# Altium PCB acqboard.PcbDoc (part 4 of 5)
Units mil, origin at the board's own origin, x right, y up, seen from the top; angles counter-clockwise.
Board outline 7000 x 5250 mil, 4 copper layers (Top Layer, Internal Plane 1, Internal Plane 2, Bottom Layer); 570 components, 356 nets, 1973 pads, 766 vias.
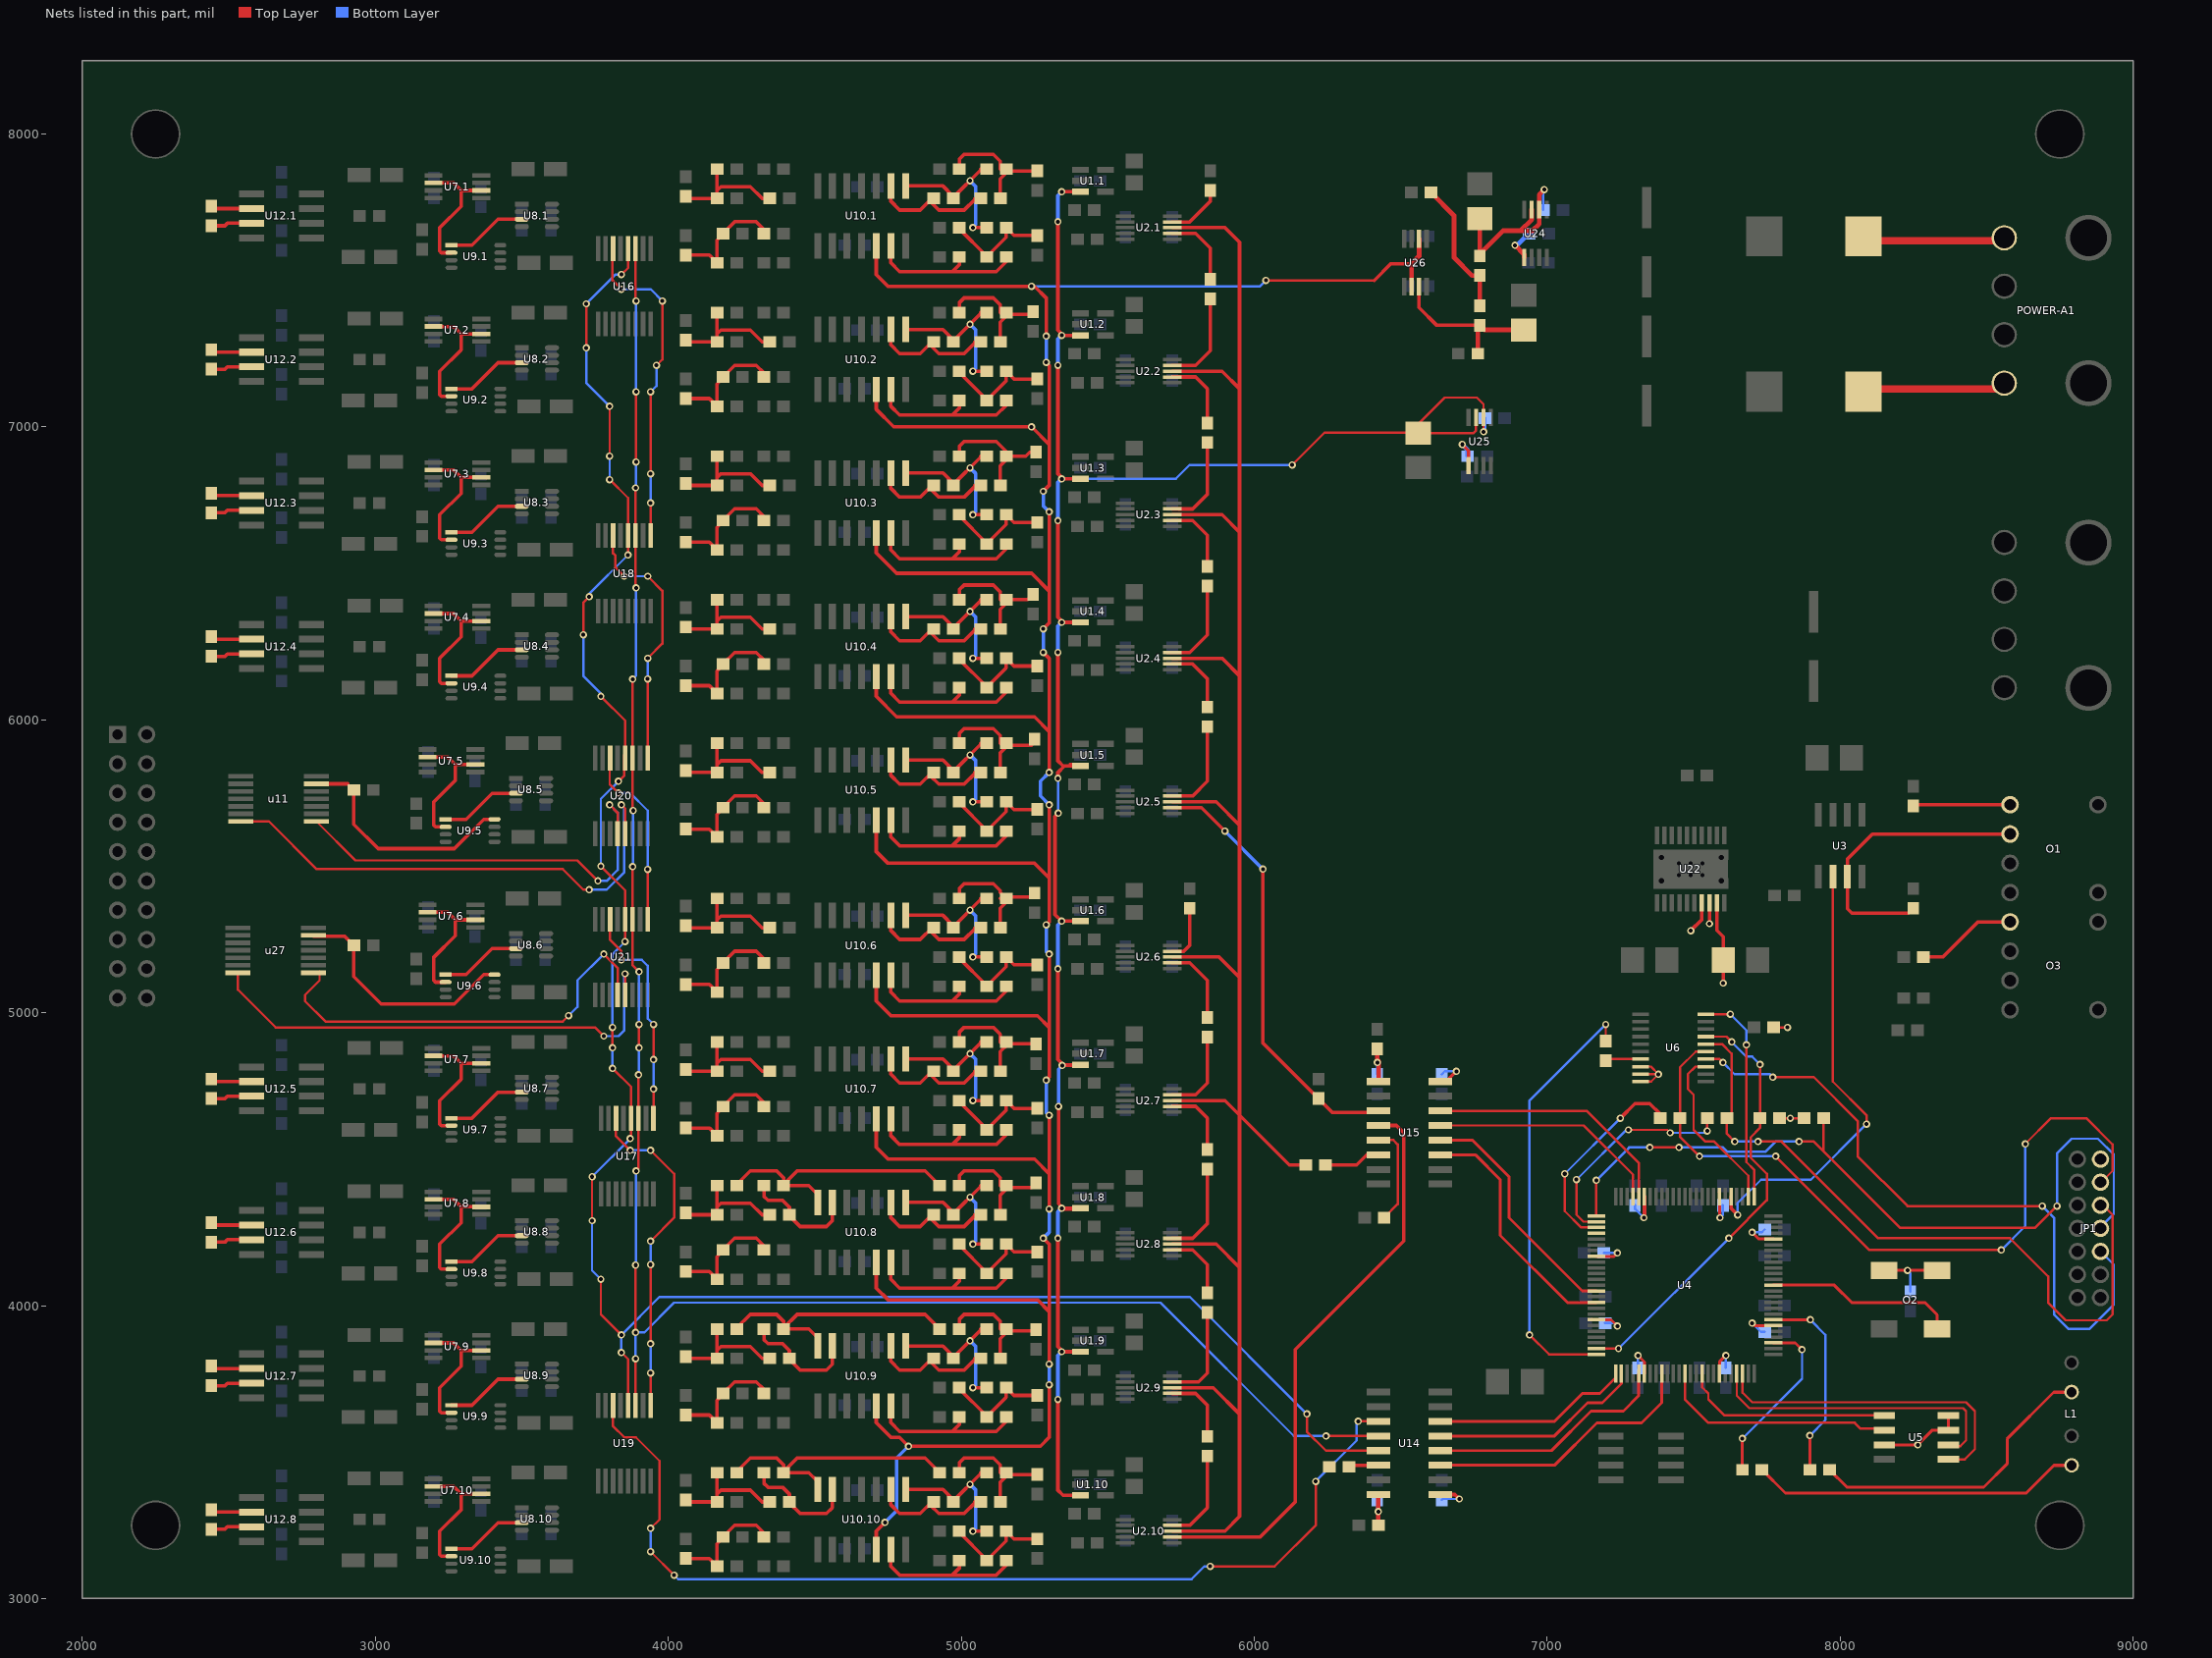
[diagram p6: the nets of this part, all layers, seen from the top]

## Via types
v1: diameter 25, hole 13.5, Top Layer to Bottom Layer, 753 vias
v2: diameter 40, hole 20, Top Layer to Bottom Layer, 13 vias

## Nets (pads, with @x,y where several pads share a name; then routed paths per layer and width w, separated by ;. In a path a pad name is that pad's centre, name@x,y a point inside that pad or via, vN(x,y) a via of type N, cw(c..) or ccw(c..) an arc to the next point about the centre after c; other vN are vias at no path point) (continued)
NetC36.8_1: C36.8.1 R15.8.1 R22.8.1 U10.8.14 | length 934.5
  Top Layer w12: R15.8.1@4233.46,4410 4233.46,4413.46 4280,4460 4370,4460 4393.46,4436.54 C36.8.1@4393.46,4410 4480,4410 4510,4380 U10.8.14@4510,4352.36 ; C36.8.1@4393.46,4413.46 4440,4460 4876.54,4460 R22.8.1@4916.54,4420
NetC36.8_2: C36.8.2 R19.8.2 U10.8.13 | length 401.1
  Top Layer w12: C36.8.2@4326.54,4410 4326.54,4373.46 4340,4360 4390,4360 4413.46,4336.54 4413.46,4306.54 4450,4270 4540,4270 4560,4290 U10.8.13@4560,4352.36
NetC36.9_1: C36.9.1 R15.9.1 R22.9.1 U10.9.14 | length 934.5
  Top Layer w12: R15.9.1@4233.46,3920 4233.46,3923.46 4280,3970 4370,3970 4393.46,3946.54 C36.9.1@4393.46,3920 4480,3920 4510,3890 U10.9.14@4510,3862.36 ; C36.9.1@4393.46,3923.46 4440,3970 4876.54,3970 R22.9.1@4916.54,3930
NetC36.9_2: C36.9.2 R19.9.2 U10.9.13 | length 401.1
  Top Layer w12: C36.9.2@4326.54,3920 4326.54,3883.46 4340,3870 4390,3870 4413.46,3846.54 4413.46,3816.54 4450,3780 4540,3780 4560,3800 U10.9.13@4560,3862.36
NetC36.10_1: C36.10.1 R15.10.1 R22.10.1 U10.10.14 | length 934.5
  Top Layer w12: R15.10.1@4233.46,3430 4233.46,3433.46 4280,3480 4370,3480 4393.46,3456.54 C36.10.1@4393.46,3430 4480,3430 4510,3400 U10.10.14@4510,3372.36 ; C36.10.1@4393.46,3433.46 4440,3480 4876.54,3480 R22.10.1@4916.54,3440
NetC36.10_2: C36.10.2 R19.10.2 U10.10.13 | length 401.1
  Top Layer w12: C36.10.2@4326.54,3430 4326.54,3393.46 4340,3380 4390,3380 4413.46,3356.54 4413.46,3326.54 4450,3290 4540,3290 4560,3310 U10.10.13@4560,3372.36
NetC37.1_2: C37.1.2 R14.1.2 R16.1.2 R17.1.1 | length 388.3
  Top Layer w12: 4080,7586.54 4140,7586.54 C37.1.2@4166.54,7560 4166.54,7636.54 R17.1.1@4190,7660 ; R17.1.1@4186.54,7660 4226.54,7700 4300,7700 4326.54,7673.46 R14.1.2@4326.54,7660
NetC37.2_2: C37.2.2 R14.2.2 R16.2.2 R17.2.1 | length 388.3
  Top Layer w12: 4080,7096.54 4140,7096.54 C37.2.2@4166.54,7070 4166.54,7146.54 R17.2.1@4190,7170 ; R17.2.1@4186.54,7170 4226.54,7210 4300,7210 4326.54,7183.46 R14.2.2@4326.54,7170
NetC37.3_2: C37.3.2 R14.3.2 R16.3.2 R17.3.1 | length 388.3
  Top Layer w12: 4080,6606.54 4140,6606.54 C37.3.2@4166.54,6580 4166.54,6656.54 R17.3.1@4190,6680 ; R17.3.1@4186.54,6680 4226.54,6720 4300,6720 4326.54,6693.46 R14.3.2@4326.54,6680
NetC37.4_2: C37.4.2 R14.4.2 R16.4.2 R17.4.1 | length 388.3
  Top Layer w12: 4080,6116.54 4140,6116.54 C37.4.2@4166.54,6090 4166.54,6166.54 R17.4.1@4190,6190 ; R17.4.1@4186.54,6190 4226.54,6230 4300,6230 4326.54,6203.46 R14.4.2@4326.54,6190
NetC37.5_2: C37.5.2 R14.5.2 R16.5.2 R17.5.1 | length 388.3
  Top Layer w12: 4080,5626.54 4140,5626.54 C37.5.2@4166.54,5600 4166.54,5676.54 R17.5.1@4190,5700 ; R17.5.1@4186.54,5700 4226.54,5740 4300,5740 4326.54,5713.46 R14.5.2@4326.54,5700
NetC37.6_2: C37.6.2 R14.6.2 R16.6.2 R17.6.1 | length 388.3
  Top Layer w12: 4080,5096.54 4140,5096.54 C37.6.2@4166.54,5070 4166.54,5146.54 R17.6.1@4190,5170 ; R17.6.1@4186.54,5170 4226.54,5210 4300,5210 4326.54,5183.46 R14.6.2@4326.54,5170
NetC37.7_2: C37.7.2 R14.7.2 R16.7.2 R17.7.1 | length 388.3
  Top Layer w12: 4080,4606.54 4140,4606.54 C37.7.2@4166.54,4580 4166.54,4656.54 R17.7.1@4190,4680 ; R17.7.1@4186.54,4680 4226.54,4720 4300,4720 4326.54,4693.46 R14.7.2@4326.54,4680
NetC37.8_2: C37.8.2 R14.8.2 R16.8.2 R17.8.1 | length 388.3
  Top Layer w12: 4080,4116.54 4140,4116.54 C37.8.2@4166.54,4090 4166.54,4166.54 R17.8.1@4190,4190 ; R17.8.1@4186.54,4190 4226.54,4230 4300,4230 4326.54,4203.46 R14.8.2@4326.54,4190
NetC37.9_2: C37.9.2 R14.9.2 R16.9.2 R17.9.1 | length 388.3
  Top Layer w12: 4080,3626.54 4140,3626.54 C37.9.2@4166.54,3600 4166.54,3676.54 R17.9.1@4190,3700 ; R17.9.1@4186.54,3700 4226.54,3740 4300,3740 4326.54,3713.46 R14.9.2@4326.54,3700
NetC37.10_2: C37.10.2 R14.10.2 R16.10.2 R17.10.1 | length 388.3
  Top Layer w12: 4080,3136.54 4140,3136.54 C37.10.2@4166.54,3110 4166.54,3186.54 R17.10.1@4190,3210 ; R17.10.1@4186.54,3210 4226.54,3250 4300,3250 4326.54,3223.46 R14.10.2@4326.54,3210
NetC38.1_2: C38.1.2 R15.1.2 R18.1.2 R19.1.1 | length 411.4
  Top Layer w12: C38.1.2@4060,7786.54 4066.54,7780 R18.1.2@4166.54,7780 R15.1.2@4166.54,7880 ; 4166.54,7806.54 4180,7820 4280,7820 4320,7780 R19.1.1@4346.54,7780
NetC38.2_2: C38.2.2 R15.2.2 R18.2.2 R19.2.1 | length 411.4
  Top Layer w12: C38.2.2@4060,7296.54 4066.54,7290 R18.2.2@4166.54,7290 R15.2.2@4166.54,7390 ; 4166.54,7316.54 4180,7330 4280,7330 4320,7290 R19.2.1@4346.54,7290
NetC38.3_2: C38.3.2 R15.3.2 R18.3.2 R19.3.1 | length 411.4
  Top Layer w12: C38.3.2@4060,6806.54 4066.54,6800 R18.3.2@4166.54,6800 R15.3.2@4166.54,6900 ; 4166.54,6826.54 4180,6840 4280,6840 4320,6800 R19.3.1@4346.54,6800
NetC38.4_2: C38.4.2 R15.4.2 R18.4.2 R19.4.1 | length 411.4
  Top Layer w12: C38.4.2@4060,6316.54 4066.54,6310 R18.4.2@4166.54,6310 R15.4.2@4166.54,6410 ; 4166.54,6336.54 4180,6350 4280,6350 4320,6310 R19.4.1@4346.54,6310
NetC38.5_2: C38.5.2 R15.5.2 R18.5.2 R19.5.1 | length 411.4
  Top Layer w12: C38.5.2@4060,5826.54 4066.54,5820 R18.5.2@4166.54,5820 R15.5.2@4166.54,5920 ; 4166.54,5846.54 4180,5860 4280,5860 4320,5820 R19.5.1@4346.54,5820
NetC38.6_2: C38.6.2 R15.6.2 R18.6.2 R19.6.1 | length 411.4
  Top Layer w12: C38.6.2@4060,5296.54 4066.54,5290 R18.6.2@4166.54,5290 R15.6.2@4166.54,5390 ; 4166.54,5316.54 4180,5330 4280,5330 4320,5290 R19.6.1@4346.54,5290
NetC38.7_2: C38.7.2 R15.7.2 R18.7.2 R19.7.1 | length 411.4
  Top Layer w12: C38.7.2@4060,4806.54 4066.54,4800 R18.7.2@4166.54,4800 R15.7.2@4166.54,4900 ; 4166.54,4826.54 4180,4840 4280,4840 4320,4800 R19.7.1@4346.54,4800
NetC38.8_2: C38.8.2 R15.8.2 R18.8.2 R19.8.1 | length 411.4
  Top Layer w12: C38.8.2@4060,4316.54 4066.54,4310 R18.8.2@4166.54,4310 R15.8.2@4166.54,4410 ; 4166.54,4336.54 4180,4350 4280,4350 4320,4310 R19.8.1@4346.54,4310
NetC38.9_2: C38.9.2 R15.9.2 R18.9.2 R19.9.1 | length 411.4
  Top Layer w12: C38.9.2@4060,3826.54 4066.54,3820 R18.9.2@4166.54,3820 R15.9.2@4166.54,3920 ; 4166.54,3846.54 4180,3860 4280,3860 4320,3820 R19.9.1@4346.54,3820
NetC38.10_2: C38.10.2 R15.10.2 R18.10.2 R19.10.1 | length 411.4
  Top Layer w12: C38.10.2@4060,3336.54 4066.54,3330 R18.10.2@4166.54,3330 R15.10.2@4166.54,3430 ; 4166.54,3356.54 4180,3370 4280,3370 4320,3330 R19.10.1@4346.54,3330
NetC39.1_1: C39.1.1 R20.1.1 R24.1.1 U10.1.8 | length 535.8
  Top Layer w12: U10.1.8@4810,7822.36 4937.64,7822.36 C39.1.1@4970,7790 ; C39.1.1@4970,7780 5066.54,7876.54 R20.1.1@5066.54,7880 ; v1(5040,7680) R24.1.1@5086.54,7680 R24.1.1@5086.54,7683.46
  Bottom Layer w12: v1(5030,7840) 5050,7820 5050,7690 v1(5040,7680)
NetC39.1_2: C39.1.2 R23.1.2 U10.1.9 | length 411.7
  Top Layer w12: U10.1.9@4760,7822.36 4760,7770 4790,7740 4860,7740 4900,7780 C39.1.2@4906.54,7780 ; C39.1.2@4893.7,7770 4923.7,7740 5010,7740 5046.54,7776.54 R23.1.2@5046.54,7780
NetC39.2_1: C39.2.1 R20.2.1 R24.2.1 U10.2.8 | length 535.8
  Top Layer w12: U10.2.8@4810,7332.36 4937.64,7332.36 C39.2.1@4970,7300 ; C39.2.1@4970,7290 5066.54,7386.54 R20.2.1@5066.54,7390 ; v1(5040,7190) R24.2.1@5086.54,7190 R24.2.1@5086.54,7193.46
  Bottom Layer w12: v1(5030,7350) 5050,7330 5050,7200 v1(5040,7190)
NetC39.2_2: C39.2.2 R23.2.2 U10.2.9 | length 411.7
  Top Layer w12: U10.2.9@4760,7332.36 4760,7280 4790,7250 4860,7250 4900,7290 C39.2.2@4906.54,7290 ; C39.2.2@4893.7,7280 4923.7,7250 5010,7250 5046.54,7286.54 R23.2.2@5046.54,7290
NetC39.3_1: C39.3.1 R20.3.1 R24.3.1 U10.3.8 | length 535.8
  Top Layer w12: U10.3.8@4810,6842.36 4937.64,6842.36 C39.3.1@4970,6810 ; C39.3.1@4970,6800 5066.54,6896.54 R20.3.1@5066.54,6900 ; v1(5040,6700) R24.3.1@5086.54,6700 R24.3.1@5086.54,6703.46
  Bottom Layer w12: v1(5030,6860) 5050,6840 5050,6710 v1(5040,6700)
NetC39.3_2: C39.3.2 R23.3.2 U10.3.9 | length 411.7
  Top Layer w12: U10.3.9@4760,6842.36 4760,6790 4790,6760 4860,6760 4900,6800 C39.3.2@4906.54,6800 ; C39.3.2@4893.7,6790 4923.7,6760 5010,6760 5046.54,6796.54 R23.3.2@5046.54,6800
NetC39.4_1: C39.4.1 R20.4.1 R24.4.1 U10.4.8 | length 535.8
  Top Layer w12: U10.4.8@4810,6352.36 4937.64,6352.36 C39.4.1@4970,6320 ; C39.4.1@4970,6310 5066.54,6406.54 R20.4.1@5066.54,6410 ; v1(5040,6210) R24.4.1@5086.54,6210 R24.4.1@5086.54,6213.46
  Bottom Layer w12: v1(5030,6370) 5050,6350 5050,6220 v1(5040,6210)
NetC39.4_2: C39.4.2 R23.4.2 U10.4.9 | length 411.7
  Top Layer w12: U10.4.9@4760,6352.36 4760,6300 4790,6270 4860,6270 4900,6310 C39.4.2@4906.54,6310 ; C39.4.2@4893.7,6300 4923.7,6270 5010,6270 5046.54,6306.54 R23.4.2@5046.54,6310
NetC39.5_1: C39.5.1 R20.5.1 R24.5.1 U10.5.8 | length 535.8
  Top Layer w12: U10.5.8@4810,5862.36 4937.64,5862.36 C39.5.1@4970,5830 ; C39.5.1@4970,5820 5066.54,5916.54 R20.5.1@5066.54,5920 ; v1(5040,5720) R24.5.1@5086.54,5720 R24.5.1@5086.54,5723.46
  Bottom Layer w12: v1(5030,5880) 5050,5860 5050,5730 v1(5040,5720)
NetC39.5_2: C39.5.2 R23.5.2 U10.5.9 | length 411.7
  Top Layer w12: U10.5.9@4760,5862.36 4760,5810 4790,5780 4860,5780 4900,5820 C39.5.2@4906.54,5820 ; C39.5.2@4893.7,5810 4923.7,5780 5010,5780 5046.54,5816.54 R23.5.2@5046.54,5820
NetC39.6_1: C39.6.1 R20.6.1 R24.6.1 U10.6.8 | length 535.8
  Top Layer w12: U10.6.8@4810,5332.36 4937.64,5332.36 C39.6.1@4970,5300 ; C39.6.1@4970,5290 5066.54,5386.54 R20.6.1@5066.54,5390 ; v1(5040,5190) R24.6.1@5086.54,5190 R24.6.1@5086.54,5193.46
  Bottom Layer w12: v1(5030,5350) 5050,5330 5050,5200 v1(5040,5190)
NetC39.6_2: C39.6.2 R23.6.2 U10.6.9 | length 411.7
  Top Layer w12: U10.6.9@4760,5332.36 4760,5280 4790,5250 4860,5250 4900,5290 C39.6.2@4906.54,5290 ; C39.6.2@4893.7,5280 4923.7,5250 5010,5250 5046.54,5286.54 R23.6.2@5046.54,5290
NetC39.7_1: C39.7.1 R20.7.1 R24.7.1 U10.7.8 | length 535.8
  Top Layer w12: U10.7.8@4810,4842.36 4937.64,4842.36 C39.7.1@4970,4810 ; C39.7.1@4970,4800 5066.54,4896.54 R20.7.1@5066.54,4900 ; v1(5040,4700) R24.7.1@5086.54,4700 R24.7.1@5086.54,4703.46
  Bottom Layer w12: v1(5030,4860) 5050,4840 5050,4710 v1(5040,4700)
NetC39.7_2: C39.7.2 R23.7.2 U10.7.9 | length 411.7
  Top Layer w12: U10.7.9@4760,4842.36 4760,4790 4790,4760 4860,4760 4900,4800 C39.7.2@4906.54,4800 ; C39.7.2@4893.7,4790 4923.7,4760 5010,4760 5046.54,4796.54 R23.7.2@5046.54,4800
NetC39.8_1: C39.8.1 R20.8.1 R24.8.1 U10.8.8 | length 535.8
  Top Layer w12: U10.8.8@4810,4352.36 4937.64,4352.36 C39.8.1@4970,4320 ; C39.8.1@4970,4310 5066.54,4406.54 R20.8.1@5066.54,4410 ; v1(5040,4210) R24.8.1@5086.54,4210 R24.8.1@5086.54,4213.46
  Bottom Layer w12: v1(5030,4370) 5050,4350 5050,4220 v1(5040,4210)
NetC39.8_2: C39.8.2 R23.8.2 U10.8.9 | length 411.7
  Top Layer w12: U10.8.9@4760,4352.36 4760,4300 4790,4270 4860,4270 4900,4310 C39.8.2@4906.54,4310 ; C39.8.2@4893.7,4300 4923.7,4270 5010,4270 5046.54,4306.54 R23.8.2@5046.54,4310
NetC39.9_1: C39.9.1 R20.9.1 R24.9.1 U10.9.8 | length 535.8
  Top Layer w12: U10.9.8@4810,3862.36 4937.64,3862.36 C39.9.1@4970,3830 ; C39.9.1@4970,3820 5066.54,3916.54 R20.9.1@5066.54,3920 ; v1(5040,3720) R24.9.1@5086.54,3720 R24.9.1@5086.54,3723.46
  Bottom Layer w12: v1(5030,3880) 5050,3860 5050,3730 v1(5040,3720)
NetC39.9_2: C39.9.2 R23.9.2 U10.9.9 | length 411.7
  Top Layer w12: U10.9.9@4760,3862.36 4760,3810 4790,3780 4860,3780 4900,3820 C39.9.2@4906.54,3820 ; C39.9.2@4893.7,3810 4923.7,3780 5010,3780 5046.54,3816.54 R23.9.2@5046.54,3820
NetC39.10_1: C39.10.1 R20.10.1 R24.10.1 U10.10.8 | length 535.8
  Top Layer w12: U10.10.8@4810,3372.36 4937.64,3372.36 C39.10.1@4970,3340 ; C39.10.1@4970,3330 5066.54,3426.54 R20.10.1@5066.54,3430 ; v1(5040,3230) R24.10.1@5086.54,3230 R24.10.1@5086.54,3233.46
  Bottom Layer w12: v1(5030,3390) 5050,3370 5050,3240 v1(5040,3230)
NetC39.10_2: C39.10.2 R23.10.2 U10.10.9 | length 411.7
  Top Layer w12: U10.10.9@4760,3372.36 4760,3320 4790,3290 4860,3290 4900,3330 C39.10.2@4906.54,3330 ; C39.10.2@4893.7,3320 4923.7,3290 5010,3290 5046.54,3326.54 R23.10.2@5046.54,3330
NetC40.1_2: C40.1.2 R25.1.2 U10.1.6 | length 553.6
  Top Layer w12: U10.1.6@4760,7617.64 4760,7560 4790,7530 5120,7530 5153.46,7563.46 R25.1.2@5153.46,7580 ; 4970,7530 4993.46,7553.46 C40.1.2@4993.46,7580
NetC40.2_2: C40.2.2 R25.2.2 U10.2.6 | length 553.6
  Top Layer w12: U10.2.6@4760,7127.64 4760,7070 4790,7040 5120,7040 5153.46,7073.46 R25.2.2@5153.46,7090 ; 4970,7040 4993.46,7063.46 C40.2.2@4993.46,7090
NetC40.3_2: C40.3.2 R25.3.2 U10.3.6 | length 553.6
  Top Layer w12: U10.3.6@4760,6637.64 4760,6580 4790,6550 5120,6550 5153.46,6583.46 R25.3.2@5153.46,6600 ; 4970,6550 4993.46,6573.46 C40.3.2@4993.46,6600
NetC40.4_2: C40.4.2 R25.4.2 U10.4.6 | length 553.6
  Top Layer w12: U10.4.6@4760,6147.64 4760,6090 4790,6060 5120,6060 5153.46,6093.46 R25.4.2@5153.46,6110 ; 4970,6060 4993.46,6083.46 C40.4.2@4993.46,6110
NetC40.5_2: C40.5.2 R25.5.2 U10.5.6 | length 553.6
  Top Layer w12: U10.5.6@4760,5657.64 4760,5600 4790,5570 5120,5570 5153.46,5603.46 R25.5.2@5153.46,5620 ; 4970,5570 4993.46,5593.46 C40.5.2@4993.46,5620
NetC40.6_2: C40.6.2 R25.6.2 U10.6.6 | length 553.6
  Top Layer w12: U10.6.6@4760,5127.64 4760,5070 4790,5040 5120,5040 5153.46,5073.46 R25.6.2@5153.46,5090 ; 4970,5040 4993.46,5063.46 C40.6.2@4993.46,5090
NetC40.7_2: C40.7.2 R25.7.2 U10.7.6 | length 553.6
  Top Layer w12: U10.7.6@4760,4637.64 4760,4580 4790,4550 5120,4550 5153.46,4583.46 R25.7.2@5153.46,4600 ; 4970,4550 4993.46,4573.46 C40.7.2@4993.46,4600
NetC40.8_2: C40.8.2 R25.8.2 U10.8.6 | length 553.6
  Top Layer w12: U10.8.6@4760,4147.64 4760,4090 4790,4060 5120,4060 5153.46,4093.46 R25.8.2@5153.46,4110 ; 4970,4060 4993.46,4083.46 C40.8.2@4993.46,4110
NetC40.9_2: C40.9.2 R25.9.2 U10.9.6 | length 553.6
  Top Layer w12: U10.9.6@4760,3657.64 4760,3600 4790,3570 5120,3570 5153.46,3603.46 R25.9.2@5153.46,3620 ; 4970,3570 4993.46,3593.46 C40.9.2@4993.46,3620
NetC40.10_2: C40.10.2 R25.10.2 U10.10.6 | length 553.6
  Top Layer w12: U10.10.6@4760,3167.64 4760,3110 4790,3080 5120,3080 5153.46,3113.46 R25.10.2@5153.46,3130 ; 4970,3080 4993.46,3103.46 C40.10.2@4993.46,3130
NetC41.1_2: C41.1.2 R20.1.2 R22.1.2 R23.1.1 | length 430.3
  Top Layer w12: R22.1.2@4993.46,7880 4993.46,7913.46 5010,7930 5110,7930 5133.46,7906.54 5133.46,7880 5140,7873.46 5240,7873.46 ; R23.1.1@5133.46,7780 5133.46,7846.93 R20.1.2@5160,7873.46
NetC41.2_2: C41.2.2 R20.2.2 R22.2.2 R23.2.1 | length 430.3
  Top Layer w12: R22.2.2@4993.46,7390 4993.46,7423.46 5010,7440 5110,7440 5133.46,7416.54 5133.46,7390 5140,7383.46 C41.2.2@5240,7383.46 ; R23.2.1@5133.46,7290 5133.46,7356.93 R20.2.2@5160,7383.46
NetC41.3_2: C41.3.2 R20.3.2 R22.3.2 R23.3.1 | length 435
  Top Layer w12: R22.3.2@4993.46,6900 4993.46,6933.46 5010,6950 5120,6950 R20.3.2@5160,6910 ; R23.3.1@5133.46,6800 5133.46,6866.93 R20.3.2@5160,6893.46 ; R20.3.2@5153.46,6900 5220,6900 5233.46,6913.46 C41.3.2@5255,6913.46
NetC41.4_2: C41.4.2 R20.4.2 R22.4.2 R23.4.1 | length 429.5
  Top Layer w12: R22.4.2@4993.46,6410 4993.46,6443.46 5010,6460 5110,6460 5133.46,6436.54 5133.46,6410 R20.4.2@5140,6403.46 ; R23.4.1@5133.46,6310 5133.46,6376.93 R20.4.2@5160,6403.46 ; R20.4.2@5153.46,6410 5226.54,6410 C41.4.2@5245,6428.46
NetC41.5_2: C41.5.2 R20.5.2 R22.5.2 R23.5.1 | length 430.3
  Top Layer w12: R22.5.2@4993.46,5920 4993.46,5953.46 5010,5970 5110,5970 5133.46,5946.54 5133.46,5920 5140,5913.46 C41.5.2@5240,5913.46 ; R23.5.1@5133.46,5820 5133.46,5886.93 R20.5.2@5160,5913.46
NetC41.6_2: C41.6.2 R20.6.2 R22.6.2 R23.6.1 | length 418
  Top Layer w12: R22.6.2@4993.46,5390 4993.46,5423.46 5010,5440 5110,5440 5133.46,5416.54 5133.46,5410 5148.46,5395 C41.6.2@5235,5395 ; R23.6.1@5133.46,5290 5133.46,5356.93 R20.6.2@5160,5383.46 ; R20.6.2@5133.46,5390 R20.6.2@5140,5383.46
NetC41.7_2: C41.7.2 R20.7.2 R22.7.2 R23.7.1 | length 430.3
  Top Layer w12: R22.7.2@4993.46,4900 4993.46,4933.46 5010,4950 5110,4950 5133.46,4926.54 5133.46,4900 5140,4893.46 C41.7.2@5240,4893.46 ; R23.7.1@5133.46,4800 5133.46,4866.93 R20.7.2@5160,4893.46
NetC41.8_2: C41.8.2 R20.8.2 R22.8.2 R23.8.1 | length 430.3
  Top Layer w12: R22.8.2@4993.46,4410 4993.46,4443.46 5010,4460 5110,4460 5133.46,4436.54 5133.46,4410 5140,4403.46 C41.8.2@5240,4403.46 ; R23.8.1@5133.46,4310 5133.46,4376.93 R20.8.2@5160,4403.46
NetC41.9_2: C41.9.2 R20.9.2 R22.9.2 R23.9.1 | length 430.3
  Top Layer w12: R22.9.2@4993.46,3920 4993.46,3953.46 5010,3970 5110,3970 5133.46,3946.54 5133.46,3920 5140,3913.46 C41.9.2@5240,3913.46 ; R23.9.1@5133.46,3820 5133.46,3886.93 R20.9.2@5160,3913.46
NetC41.10_2: C41.10.2 R20.10.2 R22.10.2 R23.10.1 | length 430.3
  Top Layer w12: R22.10.2@4993.46,3430 4993.46,3463.46 5010,3480 5110,3480 5133.46,3456.54 5133.46,3430 5140,3423.46 5240,3423.46 ; R23.10.1@5133.46,3330 5133.46,3396.93 R20.10.2@5160,3423.46
NetC42.1_2: C42.1.2 R21.1.2 R24.1.2 R25.1.1 | length 363.8
  Top Layer w12: R21.1.2@4993.46,7680 4993.46,7676.54 5086.54,7583.46 R25.1.1@5086.54,7580 5153.46,7646.93 R24.1.2@5153.46,7680 5180,7653.46 5240,7653.46
NetC42.2_2: C42.2.2 R21.2.2 R24.2.2 R25.2.1 | length 363.8
  Top Layer w12: R21.2.2@4993.46,7190 4993.46,7186.54 5086.54,7093.46 R25.2.1@5086.54,7090 5153.46,7156.93 R24.2.2@5153.46,7190 5180,7163.46 5240,7163.46
NetC42.3_2: C42.3.2 R21.3.2 R24.3.2 R25.3.1 | length 363.8
  Top Layer w12: R21.3.2@4993.46,6700 4993.46,6696.54 5086.54,6603.46 R25.3.1@5086.54,6600 5153.46,6666.93 R24.3.2@5153.46,6700 5180,6673.46 5240,6673.46
NetC42.4_2: C42.4.2 R21.4.2 R24.4.2 R25.4.1 | length 363.8
  Top Layer w12: R21.4.2@4993.46,6210 4993.46,6206.54 5086.54,6113.46 R25.4.1@5086.54,6110 5153.46,6176.93 R24.4.2@5153.46,6210 5180,6183.46 5240,6183.46
NetC42.5_2: C42.5.2 R21.5.2 R24.5.2 R25.5.1 | length 363.8
  Top Layer w12: R21.5.2@4993.46,5720 4993.46,5716.54 5086.54,5623.46 R25.5.1@5086.54,5620 5153.46,5686.93 R24.5.2@5153.46,5720 5180,5693.46 5240,5693.46
NetC42.6_2: C42.6.2 R21.6.2 R24.6.2 R25.6.1 | length 363.8
  Top Layer w12: R21.6.2@4993.46,5190 4993.46,5186.54 5086.54,5093.46 R25.6.1@5086.54,5090 5153.46,5156.93 R24.6.2@5153.46,5190 5180,5163.46 5240,5163.46
NetC42.7_2: C42.7.2 R21.7.2 R24.7.2 R25.7.1 | length 363.8
  Top Layer w12: R21.7.2@4993.46,4700 4993.46,4696.54 5086.54,4603.46 R25.7.1@5086.54,4600 5153.46,4666.93 R24.7.2@5153.46,4700 5180,4673.46 5240,4673.46
NetC42.8_2: C42.8.2 R21.8.2 R24.8.2 R25.8.1 | length 363.8
  Top Layer w12: R21.8.2@4993.46,4210 4993.46,4206.54 5086.54,4113.46 R25.8.1@5086.54,4110 5153.46,4176.93 R24.8.2@5153.46,4210 5180,4183.46 5240,4183.46
NetC42.9_2: C42.9.2 R21.9.2 R24.9.2 R25.9.1 | length 363.8
  Top Layer w12: R21.9.2@4993.46,3720 4993.46,3716.54 5086.54,3623.46 R25.9.1@5086.54,3620 5153.46,3686.93 R24.9.2@5153.46,3720 5180,3693.46 5240,3693.46
NetC42.10_2: C42.10.2 R21.10.2 R24.10.2 R25.10.1 | length 363.8
  Top Layer w12: R21.10.2@4993.46,3230 4993.46,3226.54 5086.54,3133.46 R25.10.1@5086.54,3130 5153.46,3196.93 R24.10.2@5153.46,3230 5180,3203.46 5240,3203.46
NetC49_2: C49.2 R35.1 U15.1 | length 164.3
  Top Layer w16: v1(6420,4830) R35.1@6420,4876.54 ; v1@6420,4840 6424.69,4835.31 U15.1@6424.69,4765
  Bottom Layer w8: C49.2@6420,4789.15 v1(6420,4830)
NetC51_2: C51.2 R39.1 U14.16 | length 146.9
  Top Layer w16: R39.1@6423.46,3250 6423.46,3353.78 U14.16@6424.69,3355
  Bottom Layer w8: C51.2@6420,3336.54 6420,3300 v1(6423.46,3296.54)
NetC54_1: C54.1 C56.1 R28.2 U24.6 U24.7 | length 655.7
  Top Layer w16: R28.2@6770,7583.46 C54.1@6770,7710.94 ; R28.2@6770,7590 6850,7670 6950,7670 6972.8,7692.8 6972.8,7792.8 v1(6990,7810) ; 6910,7670 6947.2,7707.2 U24.7@6947.2,7741.69
  Bottom Layer w8: C56.1@6986.54,7740 6986.54,7806.54 v1(6990,7810)
NetC57_1: C57.1 U24.1 | length 119.6
  Top Layer w16: v1(6890,7620) 6921.61,7588.39 U24.1@6921.61,7578.31
  Bottom Layer w16: v1(6890,7620) 6898.28,7620 C57.1@6938.28,7660
NetC60_1: C60.1 C63.1 R27.1 U26.3 | length 549.9
  Top Layer w12: U26.3@6562.8,7478.31 6562.8,7407.2 6623.46,7346.54 R27.1@6770,7346.54
  Top Layer w16: C60.1@6763.46,7250 R27.1@6763.46,7340 ; R27.1@6770,7346.54 6785.59,7330.94 C63.1@6920,7330.94
NetC76_1: C76.1 U25.1 | length 128.2
  Top Layer w12: v1(6710,6940) 6731.61,6918.39 U25.1@6731.61,6868.31
  Bottom Layer w16: v1(6710,6940) 6728.28,6921.72 C76.1@6728.28,6900
NetL1_1: L1.1 R5.2 | length 1128.9
  Top Layer w10: R5.2@7733.46,3440 7813.46,3360 8635.2,3360 8730,3454.8
  Top Layer w12: 8730,3454.8 L1.1@8790,3454.8
NetL1_3: L1.3 R6.2 | length 1035.8
  Top Layer w10: R6.2@7963.46,3440 8023.46,3380 8490,3380 8570,3460 8570,3545 8730,3705
  Top Layer w12: 8730,3705 L1.3@8790,3705
NetL2_1: L2.1 POWER-A1.4 | length 496.6
  Top Layer w25: L2.1@8070,7110 8090,7130 8530,7130 POWER-A1.4@8550,7150
NetL3_1: L3.1 POWER-A1.1 | length 483.1
  Top Layer w25: L3.1@8079,7650 8093.65,7635.35 8535.35,7635.35 POWER-A1.1@8550,7650
NetO1_1: O1.1 R1.1 | length 344.1
  Top Layer w12: R1.1@8240,5700 8250,5710 O1.1@8580,5710
NetO1_2: O1.2 R2.1 U3.3 | length 998.3
  Top Layer w12: R2.1@8250,5356.54 8233.46,5340 8040,5340 8025,5355 8025,5525 8110,5610 O1.2@8580,5610
NetO2_5: O2.5 U4.38 | length 649.7
  Top Layer w10: U4.38@7772.17,4070 7980,4070 8040,4010 8290,4010 8331.1,3968.9 O2.5@8331.1,3920
NetO3_1: O3.1 R3.2 | length 339.7
  Top Layer w12: R3.2@8290,5190 8350,5190 8470,5310 O3.1@8580,5310
NetR5_1: R5.1 U4.28 | length 601.7
  Top Layer w10: R5.1@7666.54,3440 v1(7666.54,3546.54) ; U4.28@7772.17,3873.15 7846.85,3873.15 v1(7870,3850)
  Bottom Layer w8: v1(7666.54,3546.54) 7870,3750 v1(7870,3850)
NetR6_1: R6.1 U4.32 | length 681.5
  Top Layer w10: U4.32@7772.17,3951.89 v1(7898.11,3951.89) ; R6.1@7896.54,3440 v1(7896.54,3556.54)
  Bottom Layer w8: v1(7896.54,3556.54) 7950,3610 7950,3900 v1(7898.11,3951.89)
NetR7_1: R7.1 U4.99 U6.7 | length 1515.9
  Top Layer w8: U4.99@7167.83,3853.46 v1(7243.46,3853.46) ; U6.7@7541.22,4918.39 7611.61,4918.39 v1(7630,4900) ; v1(7620,4230) 7750,4360 7750,4450 7695,4505 7695,4575 7726.54,4606.54 v1(7726.54,4823.46)
  Bottom Layer w8: v1(7243.46,3853.46) v1(7620,4230) ; v1(7630,4900) 7680,4850 7700,4850 v1(7726.54,4823.46)
NetR10_2: R10.2 U4.78 | length 712.9
  Top Layer w8: v1(7060,4450) 7060,4322.63 7115.78,4266.85 U4.78@7167.83,4266.85 ; R10.2@7386.54,4640 R10.2@7386.54,4653.46
  Top Layer w12: v1(7250,4640) 7300,4690 7350,4690 R10.2@7386.54,4653.46
  Bottom Layer w8: v1(7060,4450) v1(7250,4640)
NetR11_2: R11.2 U4.77 | length 768
  Top Layer w8: v1(7100,4430) 7100,4310 7123.46,4286.54 U4.77@7167.83,4286.54 ; v1(7277.79,4600) 7410,4600 v1(7420,4590) ; v1(7546.54,4596.54) R11.2@7546.54,4640
  Bottom Layer w8: v1(7100,4430) 7273.9,4603.9 v1(7277.79,4600) ; v1(7420,4590) 7540,4590 v1(7546.54,4596.54)
NetR12_1: R12.1 U6.17 | length 122.2
  Top Layer w8: R12.1@7200,4833.46 7208.15,4841.61 U6.17@7318.78,4841.61
NetR12_2: R12.2 U4.100 | length 1479.5
  Top Layer w8: v1(6940,3900) 7006.22,3833.78 U4.100@7167.83,3833.78 ; R12.2@7200,4903.46 v1(7200,4960)
  Bottom Layer w8: v1(6940,3900) 6940,4700 v1(7200,4960)
NetR26.1_1: R26.1.1 U12.1.2 | length 141.1
  Top Layer w12: R26.1.1@2440,7753.46 2448.46,7745 U12.1.2@2577.64,7745
NetR26.1_2: R26.1.2 U12.1.3 | length 141.1
  Top Layer w12: R26.1.2@2440,7686.54 2486.54,7686.54 2495,7695 U12.1.3@2577.64,7695
NetR26.2_1: R26.2.1 U12.2.2 | length 141.1
  Top Layer w12: R26.2.1@2440,7263.46 2448.46,7255 U12.2.2@2577.64,7255
NetR26.2_2: R26.2.2 U12.2.3 | length 141.1
  Top Layer w12: R26.2.2@2440,7196.54 2486.54,7196.54 2495,7205 U12.2.3@2577.64,7205
NetR26.3_1: R26.3.1 U12.3.2 | length 141.1
  Top Layer w12: R26.3.1@2440,6773.46 2448.46,6765 U12.3.2@2577.64,6765
NetR26.3_2: R26.3.2 U12.3.3 | length 141.1
  Top Layer w12: R26.3.2@2440,6706.54 2486.54,6706.54 2495,6715 U12.3.3@2577.64,6715
NetR26.4_1: R26.4.1 U12.4.2 | length 141.1
  Top Layer w12: R26.4.1@2440,6283.46 2448.46,6275 U12.4.2@2577.64,6275
NetR26.4_2: R26.4.2 U12.4.3 | length 141.1
  Top Layer w12: R26.4.2@2440,6216.54 2486.54,6216.54 2495,6225 U12.4.3@2577.64,6225
NetR26.5_1: R26.5.1 U12.5.2 | length 141.1
  Top Layer w12: R26.5.1@2440,4773.46 2448.46,4765 U12.5.2@2577.64,4765
NetR26.5_2: R26.5.2 U12.5.3 | length 141.1
  Top Layer w12: R26.5.2@2440,4706.54 2486.54,4706.54 2495,4715 U12.5.3@2577.64,4715
NetR26.6_1: R26.6.1 U12.6.2 | length 141.1
  Top Layer w12: R26.6.1@2440,4283.46 2448.46,4275 U12.6.2@2577.64,4275
NetR26.6_2: R26.6.2 U12.6.3 | length 141.1
  Top Layer w12: R26.6.2@2440,4216.54 2486.54,4216.54 2495,4225 U12.6.3@2577.64,4225
NetR26.7_1: R26.7.1 U12.7.2 | length 141.1
  Top Layer w12: R26.7.1@2440,3793.46 2448.46,3785 U12.7.2@2577.64,3785
NetR26.7_2: R26.7.2 U12.7.3 | length 141.1
  Top Layer w12: R26.7.2@2440,3726.54 2486.54,3726.54 2495,3735 U12.7.3@2577.64,3735
NetR26.8_1: R26.8.1 U12.8.2 | length 141.1
  Top Layer w12: R26.8.1@2440,3303.46 2448.46,3295 U12.8.2@2577.64,3295
NetR26.8_2: R26.8.2 U12.8.3 | length 141.1
  Top Layer w12: R26.8.2@2440,3236.54 2486.54,3236.54 2495,3245 U12.8.3@2577.64,3245
NetR27_2: R27.2 R28.1 R29.2 | length 474.5
  Top Layer w16: R29.2@6603.46,7796.54 R29.2@6603.46,7800 6682.19,7721.28 6682.19,7577.81 6743.46,7516.54 R28.1@6770,7516.54 R27.2@6770,7413.46
NetR40_2: R40.2 U15.5 | length 340.8
  Top Layer w8: U15.5@6424.69,4565 6475,4565 6490,4550 6490,4346.54 R40.2@6443.46,4300
NetR41_2: R41.2 U15.6 | length 195.7
  Top Layer w12: R41.2@6243.46,4480 6350,4480 6385,4515 U15.6@6424.69,4515
NetR42_1: R42.1 | length 6.5
  Top Layer w12: R42.1@6250,3450 R42.1@6256.54,3450
NetR42_2: R42.2 U14.14 | length 96.2
  Top Layer w12: R42.2@6328.46,3455 U14.14@6424.69,3455
NetU3_2: U3.2 U4.55 | length 1555.7
  Top Layer w8: U3.2@7975,5464.69 7975,4765 8090,4650 v1(8090,4620)
  Top Layer w12: U4.55@7627.48,4372.17 7627.48,4332.52 v1(7650,4310)
  Bottom Layer w8: v1(7650,4310) 7650,4350 7730,4430 7900,4430 v1(8090,4620)
NetU4_1: U4.1 U14.6 | length 674.1
  Top Layer w10: U14.6@6635.31,3605 7025,3605 7120,3700 7180,3700 7233.78,3753.78 U4.1@7233.78,3767.83
NetU4_2: U4.2 U14.5 | length 726.4
  Top Layer w10: U14.5@6635.31,3555 7025,3555 7138.32,3668.32 7188.32,3668.32 7253.46,3733.46 U4.2@7253.46,3767.83
NetU4_5: U4.5 U14.4 | length 837.6
  Top Layer w10: U14.4@6630,3500 6635,3505 7015,3505 7150,3640 7260,3640 7312.52,3692.52 U4.5@7312.52,3767.83
NetU4_9: U4.9 U14.3 | length 943.6
  Top Layer w10: U14.3@6635.31,3455 7025,3455 7170,3600 7322.52,3600 7391.26,3668.74 U4.9@7391.26,3767.83
NetU4_13: U4.13 U5.2 | length 819.3
  Top Layer w8: U4.13@7470,3767.83 7470,3680 7550,3600 8050,3600 8070,3580 U5.2@8160,3580
NetU4_16: U4.16 U5.1 | length 720
  Top Layer w8: U4.16@7529.06,3767.83 7529.06,3720.94 7550,3700 7550,3680 7605,3625 U5.1@8150.75,3625
NetU4_22: U4.22 U5.6 | length 1050.8
  Top Layer w8: U4.22@7647.17,3767.83 7647.17,3692.83 7690,3650 8420,3650 8430,3640 8430,3540 8410,3520 8374.25,3520 U5.6@8369.25,3525
NetU4_23: U4.23 U5.5 | length 1119.2
  Top Layer w8: U4.23@7666.85,3767.83 7666.85,3703.15 7700,3670 8430,3670 8460,3640 8460,3510 8425,3475 U5.5@8369.25,3475
NetU4_51: U4.51 U6.10 | length 740.3
  Top Layer w8: U6.10@7541.22,4995.16 v1(7624.84,4995.16) ; v1(7680,4890) 7680,4490 7706.22,4463.78 U4.51@7706.22,4372.17
  Bottom Layer w8: v1(7624.84,4995.16) 7680,4940 v1(7680,4890)
NetU4_52: U4.52 U6.3 | length 593
  Top Layer w8: U6.3@7541.22,4816.02 7506.02,4816.02 7480,4790 7480,4740 7500,4720 7500,4600 7540,4560 7570,4560 7686.54,4443.46 U4.52@7686.54,4372.17
NetU4_71: U4.71 U15.14 | length 866.1
  Top Layer w8: U15.14@6635.31,4665 7135,4665 7312.52,4487.48 U4.71@7312.52,4372.17
NetU4_72: U4.72 U15.13 | length 802
  Top Layer w8: U15.13@6635.31,4615 7125,4615 7292.83,4447.17 U4.72@7292.83,4372.17
NetU4_79: U4.79
NetU4_89: U4.89 U15.12 | length 827.7
  Top Layer w10: U15.12@6635.31,4565 6745,4565 6870,4440 6870,4300 7119.69,4050.32 U4.89@7167.83,4050.32
NetU4_91: U4.91 U15.11 | length 852.6
  Top Layer w10: U15.11@6635.31,4515 6755,4515 6840,4430 6840,4240 7069.06,4010.94 U4.91@7167.83,4010.94
NetU7.1_2: U7.1.2 U7.1.6 U9.1.2 | length 453.7
  Top Layer w12: U7.1.2@3198.31,7832.8 3267.2,7832.8 3292.8,7807.2 ; U9.1.2@3260,7594.41 3225.59,7594.41 3220,7600 3220,7680 3292.8,7752.8 3292.8,7807.2 ; U7.1.6@3361.69,7807.2 3292.8,7807.2
NetU7.2_2: U7.2.2 U7.2.6 U9.2.2 | length 453.7
  Top Layer w12: U7.2.2@3198.31,7342.8 3267.2,7342.8 3292.8,7317.2 ; U9.2.2@3260,7104.41 3225.59,7104.41 3220,7110 3220,7190 3292.8,7262.8 3292.8,7317.2 ; U7.2.6@3361.69,7317.2 3292.8,7317.2
NetU7.3_2: U7.3.2 U7.3.6 U9.3.2 | length 453.7
  Top Layer w12: U7.3.2@3198.31,6852.8 3267.2,6852.8 3292.8,6827.2 ; U9.3.2@3260,6614.41 3225.59,6614.41 3220,6620 3220,6700 3292.8,6772.8 3292.8,6827.2 ; U7.3.6@3361.69,6827.2 3292.8,6827.2
NetU7.4_2: U7.4.2 U7.4.6 U9.4.2 | length 453.7
  Top Layer w12: U7.4.2@3198.31,6362.8 3267.2,6362.8 3292.8,6337.2 ; U9.4.2@3260,6124.41 3225.59,6124.41 3220,6130 3220,6210 3292.8,6282.8 3292.8,6337.2 ; U7.4.6@3361.69,6337.2 3292.8,6337.2
NetU7.5_2: U7.5.2 U7.5.6 U9.5.2 | length 453.7
  Top Layer w12: U7.5.2@3178.31,5872.8 3247.2,5872.8 3272.8,5847.2 ; U9.5.2@3240,5634.41 3205.59,5634.41 3200,5640 3200,5720 3272.8,5792.8 3272.8,5847.2 ; U7.5.6@3341.69,5847.2 3272.8,5847.2
NetU7.6_2: U7.6.2 U7.6.6 U9.6.2 | length 453.7
  Top Layer w12: U7.6.2@3178.31,5342.8 3247.2,5342.8 3272.8,5317.2 ; U9.6.2@3240,5104.41 3205.59,5104.41 3200,5110 3200,5190 3272.8,5262.8 3272.8,5317.2 ; U7.6.6@3341.69,5317.2 3272.8,5317.2
NetU7.7_2: U7.7.2 U7.7.6 U9.7.2 | length 453.7
  Top Layer w12: U7.7.2@3198.31,4852.8 3267.2,4852.8 3292.8,4827.2 ; U9.7.2@3260,4614.41 3225.59,4614.41 3220,4620 3220,4700 3292.8,4772.8 3292.8,4827.2 ; U7.7.6@3361.69,4827.2 3292.8,4827.2
NetU7.8_2: U7.8.2 U7.8.6 U9.8.2 | length 453.7
  Top Layer w12: U7.8.2@3198.31,4362.8 3267.2,4362.8 3292.8,4337.2 ; U9.8.2@3260,4124.41 3225.59,4124.41 3220,4130 3220,4210 3292.8,4282.8 3292.8,4337.2 ; U7.8.6@3361.69,4337.2 3292.8,4337.2
NetU7.9_2: U7.9.2 U7.9.6 U9.9.2 | length 453.7
  Top Layer w12: U7.9.2@3198.31,3872.8 3267.2,3872.8 3292.8,3847.2 ; U9.9.2@3260,3634.41 3225.59,3634.41 3220,3640 3220,3720 3292.8,3792.8 3292.8,3847.2 ; U7.9.6@3361.69,3847.2 3292.8,3847.2
NetU7.10_2: U7.10.2 U7.10.6 U9.10.2 | length 453.7
  Top Layer w12: U7.10.2@3198.31,3382.8 3267.2,3382.8 3292.8,3357.2 ; U9.10.2@3260,3144.41 3225.59,3144.41 3220,3150 3220,3230 3292.8,3302.8 3292.8,3357.2 ; U7.10.6@3361.69,3357.2 3292.8,3357.2
NetU8.1_3: U8.1.3 U9.1.1 | length 276.8
  Top Layer w12: U9.1.1@3260,7620 3330,7620 3418.82,7708.82 U8.1.3@3500,7708.82
NetU8.2_3: U8.2.3 U9.2.1 | length 276.8
  Top Layer w12: U9.2.1@3260,7130 3330,7130 3418.82,7218.82 U8.2.3@3500,7218.82
NetU8.3_3: U8.3.3 U9.3.1 | length 276.8
  Top Layer w12: U9.3.1@3260,6640 3330,6640 3418.82,6728.82 U8.3.3@3500,6728.82
NetU8.4_3: U8.4.3 U9.4.1 | length 276.8
  Top Layer w12: U9.4.1@3260,6150 3330,6150 3418.82,6238.82 U8.4.3@3500,6238.82
NetU8.5_3: U8.5.3 U9.5.1 | length 276.8
  Top Layer w12: U9.5.1@3240,5660 3310,5660 3398.82,5748.82 U8.5.3@3480,5748.82
NetU8.6_3: U8.6.3 U9.6.1 | length 276.8
  Top Layer w12: U9.6.1@3240,5130 3310,5130 3398.82,5218.82 U8.6.3@3480,5218.82
NetU8.7_3: U8.7.3 U9.7.1 | length 276.8
  Top Layer w12: U9.7.1@3260,4640 3330,4640 3418.82,4728.82 U8.7.3@3500,4728.82
NetU8.8_3: U8.8.3 U9.8.1 | length 276.8
  Top Layer w12: U9.8.1@3260,4150 3330,4150 3418.82,4238.82 U8.8.3@3500,4238.82
NetU8.9_3: U8.9.3 U9.9.1 | length 276.8
  Top Layer w12: U9.9.1@3260,3660 3330,3660 3418.82,3748.82 U8.9.3@3500,3748.82
NetU8.10_3: U8.10.3 U9.10.1 | length 276.8
  Top Layer w12: U9.10.1@3260,3170 3330,3170 3418.82,3258.82 U8.10.3@3500,3258.82
NetU10.1_5: U10.1.5 U10.2.5 U10.3.5 U10.4.5 U10.5.5 U10.6.5 U10.7.5 U10.8.5 U10.9.5 U10.10.5 U26.2 U26.6 | length 12302
  Top Layer w8: v1(6040,7500) 6410,7500
  Top Layer w12: U10.10.5@4710,3167.64 4710,3230 v1(4740,3260) ; U10.9.5@4710,3657.64 4710,3600 4760,3550 4790,3550 v1(4820,3520) 5270,3520 5300,3550 v1(5300,3730) ; U10.8.5@4710,4147.64 4710,4060 4750,4020 5260,4020 5300,3980 ; U10.7.5@4710,4637.64 4710,4540 4750,4500 5250,4500 5300,4450 ; U10.6.5@4710,5127.64 4710,5040 4760,4990 5260,4990 5300,4950 ; U10.5.5@4710,5657.64 4710,5550 4750,5510 5250,5510 5300,5460 ; U10.4.5@4710,6147.64 4710,6080 4780,6010 5250,6010 5300,5960 ; U10.3.5@4710,6637.64 4710,6570 4780,6500 5240,6500 5300,6440 ; U10.2.5@4710,7127.64 4710,7060 4770,7000 v1(5240,7000) 5300,6940 ; U10.1.5@4710,7617.64 4710,7520 4750,7480 5250,7480 5290,7440 v1(5290,7310) ; v1(5280,4230) 5300,4210 v1(5300,3800) ; v1(5280,6230) 5300,6210 v1(5300,5820) ; v1(5280,6310) 5300,6330 v1(5300,6710) ; v1(5280,6780) 5300,6800 5300,7210 v1(5290,7220) ; v1(5290,4770) 5300,4780 v1(5300,5200) ; v1(5290,5300) 5300,5310 v1(5300,5710) ; v1(5300,4330) v1(5300,4650) ; 6410,7500 6467.2,7557.2 6537.2,7557.2
  Top Layer w16: U26.2@6537.2,7478.31 6537.2,7557.2 6562.8,7582.8 U26.6@6562.8,7641.69
  Bottom Layer w8: v1(5240,7480) 6020,7480 v1(6040,7500)
  Bottom Layer w12: v1(4740,3260) 4780,3300 4780,3480 v1(4820,3520) ; v1(5280,4230) 5300,4250 v1(5300,4330) ; v1(5280,6230) v1(5280,6310) ; v1(5280,6780) 5280,6730 v1(5300,6710) ; v1(5290,4770) 5290,4660 v1(5300,4650) ; v1(5290,5300) 5290,5210 v1(5300,5200) ; v1(5290,7220) v1(5290,7310) ; v1(5300,3730) v1(5300,3800) ; v1(5300,5710) 5270,5740 5270,5790 v1(5300,5820)
Netu11_1: u11.1 U20.4 | length 1472.1
  Top Layer w8: u11.1@2798.94,5653.23 2932.17,5520 3690,5520 v1(3760,5450) ; v1(3800,5710) 3827.2,5682.8 U20.4@3827.2,5611.06
  Bottom Layer w8: v1(3760,5450) 3790,5450 3827.2,5487.2 3827.2,5682.8 v1(3800,5710)
Netu11_14: u11.14 U20.5 | length 1768.8
  Top Layer w8: u11.14@2541.06,5653.23 2636.77,5653.23 2800,5490 3640,5490 3710,5420 v1(3730,5420) ; v1(3840,5710) 3852.8,5697.2 U20.5@3852.8,5611.06
  Bottom Layer w8: v1(3730,5420) 3790,5420 3850,5480 3850,5700 v1(3840,5710)
NetU14_11: U14.11 U19.14 | length 3470.3
  Top Layer w8: U19.14@3811.61,3658.94 3811.61,3588.39 3850,3550 3890,3550 3970,3470 3970,3270 v1(3940,3240) ; v1(3940,3160) v1(4020,3080) ; v1(5850,3110) 6070,3110 6210,3250 v1(6210,3400) ; v1(6355,3605) U14.11@6424.69,3605
  Bottom Layer w8: v1(3940,3160) v1(3940,3240) ; v1(4020,3080) 4034,3066 5786,3066 5830,3110 v1(5850,3110) ; v1(6210,3400) 6350,3540 6350,3600 v1(6355,3605)
NetU21_4: U21.4 u27.1 | length 1476.2
  Top Layer w8: u27.1@2810,5140 2810,5110 2760,5060 2760,5040 2830,4970 3640,4970 v1(3660,4990) ; v1(3780,5200) 3827.2,5152.8 U21.4@3827.2,5061.06
  Bottom Layer w8: v1(3660,4990) 3690,5020 3690,5110 v1(3780,5200)
NetU21_5: U21.5 u27.14 | length 1716
  Top Layer w8: u27.14@2531.06,5136.23 2531.06,5078.94 2660,4950 3750,4950 v1(3780,4920) ; U21.5@3852.8,5061.06 v1(3852.8,5132.8)
  Bottom Layer w8: v1(3780,4920) 3830,4920 3850,4940 3850,5130 v1(3852.8,5132.8)
PGAIN5: C30.5.2 U9.5.8 u11.6 | length 779.3
  Top Layer w12: u11.6@2798.94,5781.18 2905.35,5781.18 ; C30.5.2@2926.54,5760 2926.54,5643.46 3010,5560 3270,5560 3370,5660 U9.5.8@3406.93,5660
PGAIN6: C30.6.2 U9.6.8 u27.6 | length 817.6
  Top Layer w12: u27.6@2788.94,5261.18 2895.35,5261.18 C30.6.2@2926.54,5230 2926.54,5123.46 3020,5030 3270,5030 3370,5130 U9.6.8@3406.93,5130
RCLK: U14.13 U16.12 U17.12 U18.12 U19.12 U20.12 U21.12 | length 7321.7
  Top Layer w8: v1(3710,6290) 3710,6400 v1(3730,6420) ; v1(3720,7270) v1(3720,7420) ; v1(3740,4290) v1(3740,4440) ; v1(3770,4090) 3770,3970 v1(3840,3900) ; v1(3770,5500) 3852.8,5417.2 v1(3852.8,5242.8) ; v1(3770,6080) 3852.8,5997.2 U20.12@3852.8,5868.94 ; v1(3800,6820) 3862.8,6757.2 v1(3862.8,6562.8) ; v1(3800,6900) v1(3800,7070) ; v1(3810,4810) 3872.8,4747.2 3872.8,4572.8 v1(3870,4570) ; v1(3810,4880) v1(3810,4950) ; v1(3830,5790) 3850,5810 U20.12@3850,5880 ; v1(3840,3840) 3862.8,3817.2 U19.12@3862.8,3658.94 ; v1(3840,7520) 3862.8,7542.8 U16.12@3862.8,7608.94 ; v1(6180,3630) 6180,3570 6245,3505 U14.13@6424.69,3505
  Bottom Layer w8: v1(3710,6290) 3710,6150 3770,6090 v1(3770,6080) ; v1(3720,7270) 3720,7150 v1(3800,7070) ; v1(3720,7420) 3820,7520 v1(3840,7520) ; v1(3730,6420) 3730,6430 v1(3862.8,6562.8) ; v1(3740,4290) 3740,4120 v1(3770,4090) ; v1(3740,4440) v1(3870,4570) ; v1(3770,5500) 3770,5730 v1(3830,5790) ; v1(3800,6820) v1(3800,6900) ; v1(3810,4810) v1(3810,4880) ; v1(3810,4950) 3810,5200 v1(3852.8,5242.8) ; v1(3840,3840) v1(3840,3900) 3970,4030 5780,4030 v1(6180,3630)
REF: C64.1 C66.1 U1.1.3 U1.2.3 U1.3.3 U1.4.3 U1.5.3 U1.6.3 U1.7.3 U1.8.3 U1.9.3 U1.10.3 U25.6 U25.7 | length 7346.9
  Top Layer w8: 5370,5850 U1.5.3@5410,5850 ; v1(6130,6870) 6240,6980 C64.1@6560,6980 ; U25.7@6757.2,7031.69 6757.2,6987.2 6749.06,6979.06 C64.1@6560,6979.06 6560,7010 6650,7100 6760,7100 6782.8,7077.2 v1(6782.8,6982.8)
  Top Layer w12: v1(5330,3680) 5330,3370 5347.4,3352.6 U1.10.3@5407.68,3352.6 ; v1(5330,4230) 5330,3860 v1@5347.4,3842.6 ; v1(5330,5150) 5330,4840 5347.4,4822.6 U1.7.3@5407.68,4822.6 ; v1(5330,5800) 5330,5820 5352.6,5842.6 ; v1(5330,6230) 5330,5860 5347.4,5842.6 U1.5.3@5407.68,5842.6 ; v1(5330,6680) 5330,6350 v1@5347.4,6332.6 ; v1(5330,7210) 5330,6840 v1@5347.4,6822.6 ; v1(5330,7700) 5330,7330 v1@5347.4,7312.6 ; v1(5331,5681) 5320,5670 5320,5335.2 v1(5342.6,5312.6) U1.6.3@5407.68,5312.6 ; v1(5332.32,4680) 5332.32,4347.4 5349.72,4330 U1.8.3@5410,4330 ; v1(5342.6,3842.6) U1.9.3@5407.68,3842.6 ; v1(5342.6,4332.6) U1.8.3@5407.68,4332.6 ; v1(5342.6,6332.6) U1.4.3@5407.68,6332.6 ; v1(5342.6,6822.6) U1.3.3@5407.68,6822.6 ; v1(5342.6,7312.6) U1.2.3@5407.68,7312.6 ; v1(5342.6,7802.6) U1.1.3@5407.68,7802.6 ; v1(5344.92,4820) U1.7.3@5410,4820
  Bottom Layer w8: v1(5330,5800) 5331,5799 v1(5331,5681) ; v1(5342.6,6822.6) 5732.6,6822.6 5780,6870 v1(6130,6870) ; v1(6782.8,6982.8) 6788.28,6988.28 C66.1@6788.28,7030
  Bottom Layer w12: v1(5330,3680) 5330,3830 v1(5342.6,3842.6) ; v1(5330,4230) 5330,4320 v1(5342.6,4332.6) ; v1(5330,5150) 5330,5300 v1(5342.6,5312.6) ; v1(5330,6230) 5330,6320 v1(5342.6,6332.6) ; v1(5330,6680) 5330,6810 v1(5342.6,6822.6) ; v1(5330,7210) 5330,7300 v1(5342.6,7312.6) ; v1(5330,7700) 5330,7790 v1(5342.6,7802.6) ; v1(5332.32,4680) 5332.32,4807.4 v1(5344.92,4820)
S0: U17.14 U19.9 | length 1136.5
  Top Layer w8: U17.14@3821.61,4638.94 3821.61,4578.39 v1(3870,4530) ; U19.9@3939.57,3658.94 v1(3939.57,3770.43) ; v1(3940,3870) v1(3940,4140) ; v1(3940,4220) 4020,4300 4020,4450 v1(3940,4530)
  Bottom Layer w8: v1(3870,4530) v1(3940,4530) ; v1(3939.57,3770.43) 3940,3770.87 v1(3940,3870) ; v1(3940,4140) v1(3940,4220)
S1: U17.9 U21.14 | length 782.6
  Top Layer w8: U21.14@3801.61,5318.94 3801.61,5248.39 3840,5210 v1(3840,5180) ; U17.9@3949.57,4638.94 v1(3949.57,4739.57) ; v1(3950,4840) v1(3950,4960)
  Bottom Layer w8: v1(3840,5180) 3910,5180 3930,5160 3930,4980 v1(3950,4960) ; v1(3949.57,4739.57) 3950,4740 v1(3950,4840)
S2: U20.14 U21.9 | length 628.1
  Top Layer w8: U20.14@3801.61,5868.94 3800,5867.32 3800,5780 v1(3830,5750) ; U21.9@3929.57,5318.94 v1(3929.57,5489.57)
  Bottom Layer w8: v1(3830,5750) 3870,5750 3930,5690 3930,5490 v1(3929.57,5489.57)
S3: U18.14 U20.9 | length 897.5
  Top Layer w8: U18.14@3811.61,6628.94 3811.61,6568.39 3820,6560 3820,6520 v1(3850,6490) ; U20.9@3929.57,5868.94 v1(3929.57,6139.57) ; v1(3930,6210) 3980,6260 3980,6440 v1(3930,6490)
  Bottom Layer w8: v1(3850,6490) v1(3930,6490) ; v1(3929.57,6139.57) 3930,6140 v1(3930,6210)
S4: U16.14 U18.9 | length 1116.8
  Top Layer w8: U16.14@3810,7600 3810,7500 v1(3840,7470) ; U18.9@3939.57,6628.94 v1(3939.57,6740.43) ; v1(3940,6840) v1(3940,7120) ; v1(3960,7210) 3980,7230 v1(3980,7430)
  Bottom Layer w8: v1(3840,7470) 3940,7470 v1(3980,7430) ; v1(3939.57,6740.43) 3940,6740.87 v1(3940,6840) ; v1(3940,7120) 3960,7140 v1(3960,7210)
SCK: R41.1 U2.1.8 U2.2.8 U2.3.8 U2.4.8 U2.5.8 U2.6.8 U2.7.8 U2.8.8 U2.9.8 U2.10.8 | length 7212.6
  Top Layer w12: U2.10.8@5720.71,3230 5900,3230 5950,3280 5950,7630 5900,7680 U2.1.8@5720.71,7680 ; U2.9.8@5720.71,3720 5860,3720 5950,3630 ; U2.8.8@5720.71,4210 5870,4210 5950,4130 ; U2.7.8@5720.71,4700 5900,4700 6120,4480 R41.1@6180,4480 ; U2.6.8@5720.71,5190 5880,5190 5950,5120 ; U2.5.8@5720.71,5720 5870,5720 5950,5640 ; U2.4.8@5720.71,6210 5890,6210 5950,6150 ; U2.3.8@5720.71,6700 5890,6700 5950,6640 ; U2.2.8@5720.71,7190 5890,7190 5950,7130
SDI1: R46.2 U2.1.9 | length 195
  Top Layer w12: U2.1.9@5720.71,7699.69 5779.69,7699.69 5850,7770 R46.2@5850,7806.54
SDI2: R44.2 U2.2.9 | length 320.1
  Top Layer w12: U2.2.9@5720.71,7209.69 5799.69,7209.69 5850,7260 R44.2@5850,7430
SDI3: R43.2 U2.3.9 | length 316.7
  Top Layer w12: U2.3.9@5720.71,6719.69 5789.69,6719.69 5840,6770 R43.2@5840,6946.54
SDI4: R37.2 U2.4.9 | length 310.8
  Top Layer w12: U2.4.9@5720.71,6229.69 5779.69,6229.69 5840,6290 R37.2@5840,6456.54
SDI5: R36.2 U2.5.9 | length 326.7
  Top Layer w12: U2.5.9@5720.71,5739.69 5789.69,5739.69 5840,5790 R36.2@5840,5976.54
SDI6: R45.2 U2.6.9 | length 194.2
  Top Layer w12: U2.6.9@5720.71,5209.69 5759.69,5209.69 5780,5230 R45.2@5780,5356.54
SDI7: R34.2 U2.7.9 | length 292.5
  Top Layer w12: U2.7.9@5720.71,4719.69 5799.69,4719.69 5840,4760 R34.2@5840,4916.54
SDI8: R33.2 U2.8.9 | length 326.7
  Top Layer w12: U2.8.9@5720.71,4229.69 5789.69,4229.69 5840,4280 R33.2@5840,4466.54
SDI9: R32.2 U2.9.9 | length 338.4
  Top Layer w12: U2.9.9@5720.71,3739.68 5809.69,3739.68 5840,3770 R32.2@5840,3976.54
SDI10: R31.2 U2.10.9 | length 320.8
  Top Layer w12: U2.10.9@5720.71,3249.68 5779.69,3249.68 5840,3310 R31.2@5840,3486.54
SDO1: R44.1 U2.1.7 | length 256.7
  Top Layer w12: U2.1.7@5720.71,7660.31 5799.69,7660.31 5850,7610 R44.1@5850,7503.46
SDO2: R43.1 U2.2.7 | length 252.5
  Top Layer w12: U2.2.7@5720.71,7170.31 5799.69,7170.31 5840,7130 R43.1@5840,7013.46
SDO3: R37.1 U2.3.7 | length 246.7
  Top Layer w12: U2.3.7@5720.71,6680.31 5789.69,6680.31 5840,6630 R37.1@5840,6523.46
SDO4: R36.1 U2.4.7 | length 236.7
  Top Layer w12: U2.4.7@5720.71,6190.31 5789.69,6190.31 5840,6140 R36.1@5840,6043.46
SDO5: R38.2 U2.5.7 U15.3 | length 1487.8
  Top Layer w12: U2.5.7@5720.71,5700.31 5819.69,5700.31 v1(5900,5620) ; v1(6030,5490) 6030,4896.54 6266.54,4660 U15.3@6430,4660
  Bottom Layer w12: v1(5900,5620) v1(6030,5490)
SDO6: R34.1 U2.6.7 | length 270.8
  Top Layer w12: U2.6.7@5720.71,5170.31 5779.69,5170.31 5840,5110 R34.1@5840,4983.46
SDO7: R33.1 U2.7.7 | length 242.5
  Top Layer w12: U2.7.7@5720.71,4680.31 5799.69,4680.31 5840,4640 R33.1@5840,4533.46
SDO8: R32.1 U2.8.7 | length 236.7
  Top Layer w12: U2.8.7@5720.71,4190.31 5789.69,4190.31 5840,4140 R32.1@5840,4043.46
SDO9: R31.1 U2.9.7 | length 242.5
  Top Layer w12: U2.9.7@5720.71,3700.32 5799.69,3700.32 5840,3660 R31.1@5840,3553.46
SDO10: U2.10.7 U15.4 | length 1977.8
  Top Layer w12: U2.10.7@5720.71,3210.32 6020.31,3210.32 6140,3330 6140,3850 6510,4220 6510,4590 6485,4615 U15.4@6424.69,4615
SRCLK: U14.12 U16.11 U17.11 U18.11 U19.11 U20.11 U21.11 | length 6738.8
  Top Layer w8: v1(3878.39,5498.39) 3878.39,5161.61 v1(3900,5140) ; v1(3878.39,6138.39) 3878.39,5691.61 v1(3880,5690) ; U19.11@3888.39,3658.94 v1(3888.39,3818.39) ; v1(3888.39,3908.39) v1(3888.39,4138.39) ; v1(3888.39,6791.61) 3888.39,6451.61 v1(3890,6450) ; U16.11@3888.39,7608.94 3888.39,7431.61 v1(3890,7430) ; v1(3890,4460) 3898.39,4468.39 v1(3898.39,4788.39) ; v1(3890,6880) v1(3890,7120) ; v1(3900,4880) v1(3900,4960) ; v1(6245,3555) U14.12@6424.69,3555
  Bottom Layer w8: v1(3878.39,5498.39) 3880,5500 v1(3880,5690) ; v1(3878.39,6138.39) 3890,6150 v1(3890,6450) ; v1(3888.39,3818.39) v1(3888.39,3908.39) 3918.39,3908.39 4020,4010 5680,4010 6135,3555 v1(6245,3555) ; v1(3888.39,4138.39) 3890,4140 v1(3890,4460) ; v1(3888.39,6791.61) 3890,6793.23 v1(3890,6880) ; v1(3890,7120) v1(3890,7430) ; v1(3898.39,4788.39) 3900,4790 v1(3900,4880) ; v1(3900,4960) v1(3900,5140)
TCK: JP1.6 R11.1 U6.6 | length 2420.4
  Top Layer w8: U6.6@7541.22,4892.8 7597.2,4892.8 7630,4860 7630,4656.54 R11.1@7613.46,4640 7613.46,4586.54 v1(7640,4560) ; v1(7720,4560) 7800,4560 8130,4230 8580,4230 8710,4100 8710,4010 8770,3950 8910,3950 8930,3970 8930,4310 JP1.6@8890,4350
  Bottom Layer w8: v1(7640,4560) v1(7720,4560)
TDI: JP1.10 U6.4 | length 2272.7
  Top Layer w8: U6.4@7541.22,4841.61 7588.39,4841.61 v1(7600,4830) ; v1(7770,4780) 7910,4780 8060,4630 8060,4510 8230,4340 v1(8690,4340)
  Bottom Layer w8: v1(7600,4830) 7640,4790 7760,4790 v1(7770,4780) ; v1(8690,4340) 8730,4300 8730,3970 8780,3920 8850,3920 8934,4004 8934,4139.78 JP1.10@8888.74,4185.04
TDO: JP1.8 R9.1 U4.76 | length 2714.7
  Top Layer w8: U4.76@7167.83,4306.22 v1(7167.83,4427.83) ; v1(7350,4540) v1(7450,4540) ; v1(7860,4560) 7910,4560 8203.78,4266.22 8666.22,4266.22 v1(8740,4340) ; 7943.46,4526.54 R9.1@7943.46,4640
  Bottom Layer w8: v1(7167.83,4427.83) 7280,4540 v1(7350,4540) ; v1(7450,4540) 7600,4540 7615,4525 7745,4525 7780,4560 v1(7860,4560) ; v1(8740,4340) 8740,4520 8790,4570 8880,4570 8934,4516 8934,4314 8888.74,4268.74 JP1.8@8888.74,4263.78
TMS: JP1.4 R10.1 U6.5 | length 2516.1
  Top Layer w8: v1(7520,4510) 7453.46,4576.54 7453.46,4813.46 7507.2,4867.2 U6.5@7541.22,4867.2 ; v1(7780,4510) 8100,4190 v1(8550,4190) ; v1(8632,4552) 8720,4640 8840,4640 8930,4550 8930,4460 JP1.4@8891.26,4421.26
  Bottom Layer w8: v1(7520,4510) v1(7780,4510) ; v1(8550,4190) 8632,4272 v1(8632,4552)
VCC: C9.1 C12.1 C13.1 C14.1 C15.1 C16.1 C17.1 C18.1 C19.1 C50.2 C52.2 C67.1 JP1.2 O2.1 O2.8 R7.2 R8.2 R9.2 U4.6 U4.19 U4.31 U4.46 U4.57 U4.70 U4.83 U4.94 U5.3 U5.7 U5.8 U6.18 U6.19 U6.20 U14.1 U15.16 U22.17 U22.18 U22.19 | length 2590.1
  Top Layer w8: U6.20@7318.78,4764.84 7354.84,4764.84 v1(7380,4790) 7353.98,4816.02 U6.18@7318.78,4816.02 ; U6.19@7318.78,4790.43 v1@7379.57,4790.43 ; R8.2@7773.46,4950 v1(7820,4950) ; R7.2@7793.46,4640 R9.2@7876.54,4640
  Top Layer w10: U4.94@7167.83,3951.89 7218.11,3951.89 v1(7240,3930) ; U4.83@7167.83,4168.43 7228.43,4168.43 v1(7240,4180) ; v1(7310,3830) 7332.2,3807.8 U4.6@7332.2,3767.83 ; U4.19@7588.11,3767.83 7588.11,3808.11 v1(7610,3830) ; U4.57@7588.11,4372.17 7588.11,4301.89 v1(7590,4300) ; v1(7700,3940) 7707.8,3932.2 U4.31@7772.17,3932.2 ; v1(7700,4250) 7722.52,4227.48 U4.46@7772.17,4227.48 ; O2.1@8150,4120 O2.8@8331.1,4120 ; U5.3@8150.75,3525 v1(8265,3525) 8315,3575 U5.7@8369.25,3575 ; U5.8@8369.25,3625 8369.25,3570.75 U5.7@8370,3570
  Top Layer w12: U14.1@6635.31,3355 6685,3355 v1(6700,3340) ; U15.16@6635.31,4765 6655,4765 v1(6690,4800) ; v1(7330,4300) 7332.2,4302.2 U4.70@7332.2,4372.17 ; v1(7490,5280) 7528.2,5318.2 U22.17@7528.2,5375 ; v1(7553.8,5303.8) U22.18@7553.8,5375 ; U22.19@7579.4,5375 7579.4,5280.6 7600.94,5259.06 v1(7600.94,5100.94)
  Bottom Layer w8: C52.2@6640,3336.54 6643.46,3340 v1(6700,3340) ; C50.2@6640,4789.15 6650.85,4800 v1(6690,4800) ; C12.1@7193.46,4180 v1(7240,4180) ; C13.1@7197.78,3940 7230,3940 v1(7240,3930) ; C19.1@7300,4342.22 7300,4330 v1(7330,4300) ; C14.1@7310,3787.78 v1(7310,3830) ; v1(7590,4300) 7600,4310 C18.1@7600,4342.22 ; C15.1@7610,3787.78 v1(7610,3830) ; v1(7700,3940) 7730,3910 C16.1@7742.22,3910 ; v1(7700,4250) 7732.22,4250 C17.1@7742.22,4260 ; v1(8230,4120) 8240,4110 C9.1@8240,4047.78
  other v1: 7830,4640
pads on no net: JP1.12 JP1.14 POWER-A1.0 POWER-D1.0 U3.5 U4.4 U4.8 U4.11 U4.12 U4.14 U4.15 U4.17 U4.21 U4.27 U4.30 U4.34 U4.35 U4.36 U4.37 U4.39 U4.40 U4.43 U4.44 U4.47 U4.49 U4.50 U4.54 U4.59 U4.60 U4.61 U4.62 U4.63 U4.64 U4.65 U4.67 U4.68 U4.74 U4.75 U4.80 U4.81 U4.85 U4.86 U4.87 U4.88 U4.90 U4.92 U4.96 U4.97 U4.98 U6.2 U6.9 U6.12 U6.13 U6.14 U6.15 U6.16 U7.1.1 U7.1.5 U7.1.8 U7.2.1 U7.2.5 U7.2.8 U7.3.1 U7.3.5 U7.3.8 U7.4.1 U7.4.5 U7.4.8 U7.5.1 U7.5.5 U7.5.8 U7.6.1 U7.6.5 U7.6.8 U7.7.1 U7.7.5 U7.7.8 U7.8.1 U7.8.5 U7.8.8 U7.9.1 U7.9.5 U7.9.8 U7.10.1 U7.10.5 U7.10.8 U9.1.5 U9.2.5 U9.3.5 U9.4.5 U9.5.5 U9.6.5 U9.7.5 U9.8.5 U9.9.5 U9.10.5 u11.7 u11.8 u11.9 U14.7 U14.10 U15.7 U15.10 U16.9 U20.6 U20.7 U21.6 U21.7 U22.1 U22.4 U22.7 U22.11 U22.15 U22.16 U22.20 U22.P0 U23.7 U24.5 U24.8 U25.5 U25.8 U26.1 U26.5 U26.8 u27.7 u27.8 u27.9

## Polygon pours and split planes (outlines as drawn)
NetC2.1_2 on Top Layer (solid): 5630,7860 5460,7860 5440,7840 5440,7770 5500,7710 5610,7710 5630,7730
GND on Top Layer (hatched 90Degree grid 8 track 8, remove dead copper): 7060,5960 7060,5360 7740,5360 7740,5960
+2.5VCC on Top Layer (hatched 90Degree grid 8 track 8, remove dead copper): 6990,4483.75 6990,3590 7760,3590 7760,4500 6990,4500
+5VCC on Bottom Layer (hatched 90Degree grid 8 track 8, remove dead copper): 8950,6780 8170,6780 8050,6661.93 6860,6661.93 6860,3110 8950,3110
+1.2VCC on Bottom Layer (hatched 90Degree grid 8 track 8, remove dead copper): 7981.27,3780 7981.27,4819.87 7701.04,5084.94 7420.82,5350 7011.27,5350 7011.27,3780
+2.5VCC on Bottom Layer (hatched 90Degree grid 8 track 8, remove dead copper): 6980,3770 7810,3770 7810,3630 7530,3350 6980,3350
AVSS on Bottom Layer (hatched 90Degree grid 8 track 8, remove dead copper): 9000,8200 2050,8200 2050,3050 6562.46,3050 6562.46,6530 6693.41,6660 8093.48,6660 8214.35,6780 9000,6780
GND on Internal Plane 1 (split plane): 6540.02,3055.01 6540.02,6525.85 6664.15,6649.98 8050,6649.98 ccw(c8050,6660) 8057.08,6652.92 8174.15,6769.98 8944.99,6769.98 8944.99,3055.01
AGND on Internal Plane 1 (split plane): 2020.02,3020.01 2020.02,8229.99 8979.99,8229.99 8979.99,3020.01
VCC on Internal Plane 2 (split plane): 6535.02,3055.01 6535.02,6527.92 6662.08,6654.98 8050,6654.98 ccw(c8050,6660) 8053.56,6656.47 8053.55,6656.45 8172.08,6774.98 8944.99,6774.98 8944.99,3055.01
AVDD on Internal Plane 2 (split plane): 2020.02,3020.01 2020.02,8229.99 8979.99,8229.99 8979.99,3020.01

## Keep-outs
Keep-Out Layer:
  lines w10: 2050,3050 8950,3050 8950,8200 2050,8200 2050,3050

## Other copper
Top Layer:
  text "Layer 1" at 9400,4750 h60